# Altium PCB KeyBoardPower.PcbDoc
Units mm, origin at the board's own origin, x right, y up, seen from the top; angles counter-clockwise.
Board outline 83 x 20 mm, 2 copper layers (Top Layer, Bottom Layer), stack 1.4 mm thick; 30 components, 22 nets, 107 pads, 40 vias.
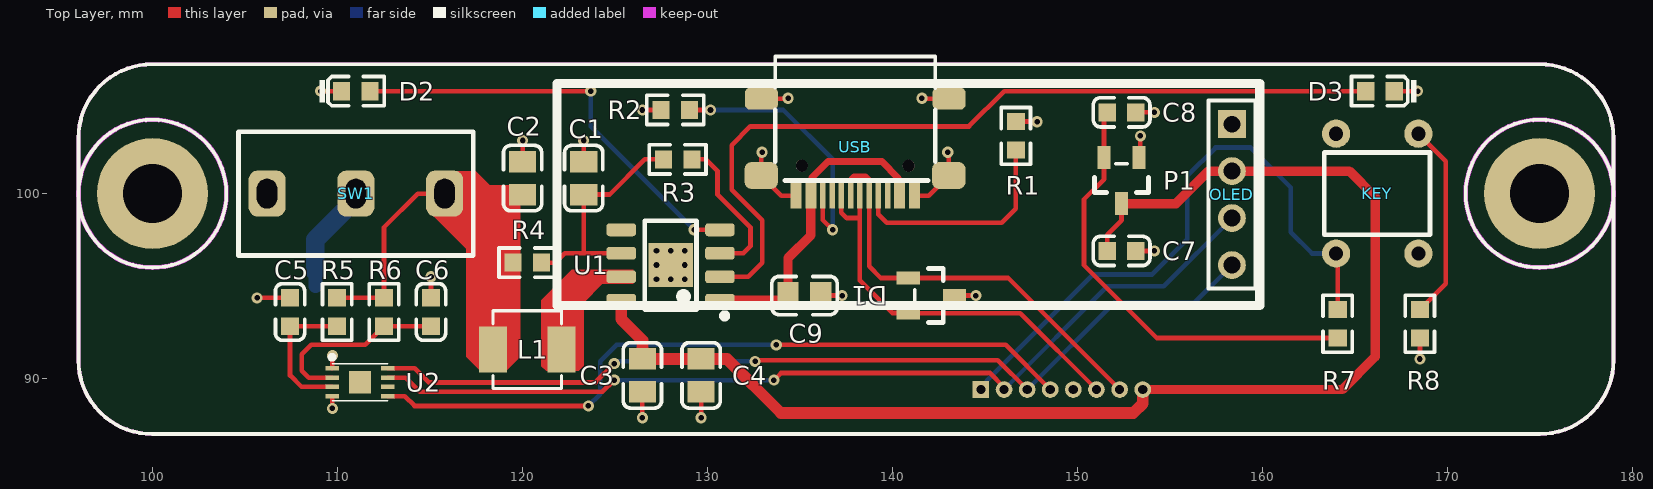
[diagram p0: Top Layer view]
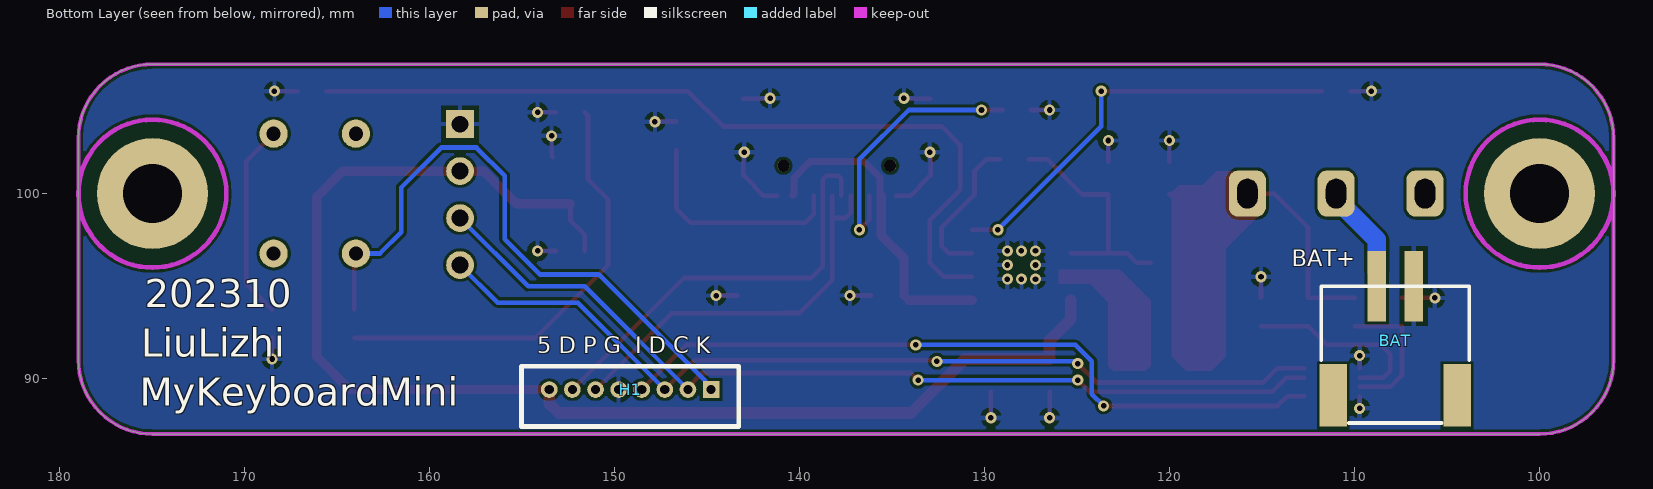
[diagram p1: Bottom Layer view, seen from below]
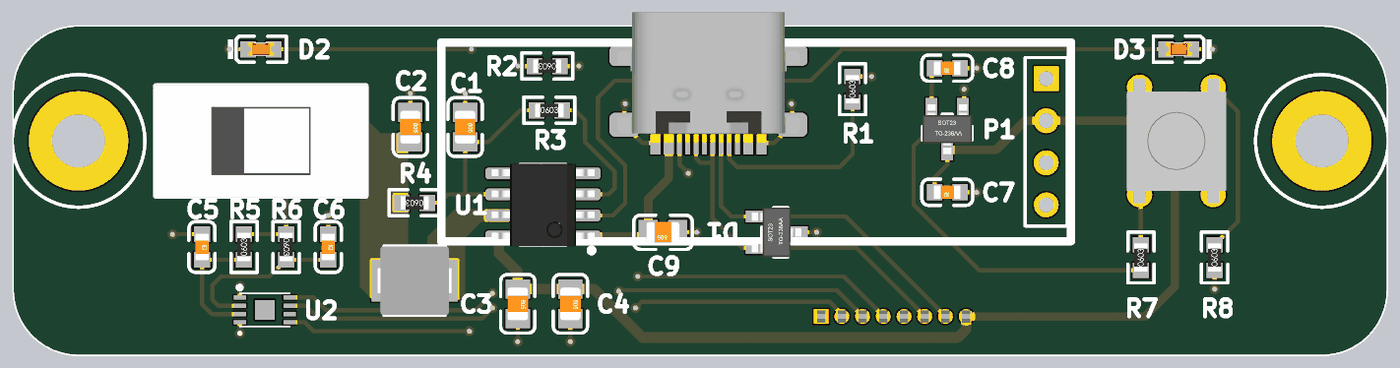
[diagram p2: 3D render of the assembled board from above, using the file's embedded part models]

## Layer stack, top to bottom
Top Solder: solder mask 0.1, Solder Resist, Dk 3.5
Top Layer: signal copper 0.4
Dielectric 1: dielectric 0.6, FR-4, Dk 4.8
Bottom Layer: signal copper 0.4
Bottom Solder: solder mask 0.1, Solder Resist, Dk 3.5

## Board outline
96,91 ccw(c100,91) 100,87 175,87 ccw(c175,91) 179,91 179,103 ccw(c175,103) 175,107 100,107 ccw(c100,103) 96,103

## Design rules (kind name [scope] priority, off if disabled: settings)
Clearance [All] p1: gap=0.152 ignorepadtopadclearanceinfootprint=FALSE
PolygonConnect [All] p1: connectstyle=Relief reliefconductorwidth=0.254 reliefentries=4 polygonreliefangle="90 Angle" airgapwidth=0.254
RoutingVias [All] p1: holewidth=0.711 width=1.27 viastyle="Through Hole" minholewidth=0.3 minwidth=0.45 maxholewidth=0.3 maxwidth=0.6
SolderMaskExpansion [All] p1: expansion=0.102 istentingtop=FALSE
Width [All] p1: maxlimit=2.54 minlimit=0.102 preferedwidth=0.254
30 further rules are at their usual default settings.

## Components (designator, comment, footprint, x,y, rotation, side; value= is the part's Value field where it differs from the comment)
BAT "PH2.0mm" PH2.0_2P_SMT_L 106.807,94.996 r0 bottom
C1 "22uF" 0805 123.317,100.838 r270 top
C2 "22uF" 0805 120.015,100.838 r270 top
C3 "22uF" 0805 126.492,90.17 r270 top
C4 "22uF" 0805 129.667,90.17 r270 top
C5 "1uF" 0603 107.442,93.599 r270 top
C6 "1uF" 0603 115.062,93.599 r270 top
C7 "104" 0603 152.4,96.901 r180 top
C8 "104" 0603 152.4,104.394 r180 top
C9 "22uF" 0805 135.255,94.488 r180 top
D1 "PESD5V2S2UT" SOT23 142.113,94.488 r0 top
D2 "LED" LED_0603 110.998,105.537 r0 top
D3 "LED" LED_0603 166.37,105.537 r180 top
H1 "SH1.25mm_8P" SH1.25MM_8P 153.543,89.408 r180 bottom locked
KEY "KEY" KEY_DIP_6 164,96.762 r90 top
L1 "1uH" L_0420 120.269,91.567 r0 top
OLED "Header_2.54_4P" HDR1_4P 158.369,103.759 r270 top locked
P1 "3V3" SOT23 152.4,100.711 r270 top
R1 "5K1" R_0603 146.685,103.124 r90 top
R2 "5K1" R_0603 128.27,104.521 r180 top
R3 "1K" R_0603 128.397,101.854 r0 top
R4 "0.5R" R_0603 120.269,96.266 r180 top
R5 "100R" R_0603 109.982,93.599 r90 top
R6 "470R" R_0603 112.522,93.599 r270 top
R7 "10K" R_0603 164.084,92.964 r90 top
R8 "100R" R_0603 168.529,92.964 r90 top
SW1 "SWITCH" SWITCH_SS12D10 111,100 r180 top locked
U1 "IP5306" eSOP8 128.016,96.139 r180 top
U2 "CW2015" CW2015_TDFN 109.728,90.551 r0 top
USB "USB_C" USB_C_16P_SMT 138,100.457 r180 top locked

## Footprints (in the part's own frame and the unit in brackets; to place one, negate y for a bottom-side part, rotate by r counter-clockwise, add the part's x,y. Pads: shape width x height; smd on the part's side, far side on the other; paste and mask are expansions set on the pad)
0603 [mm]
  rect 0.93x0.98 smd: 1(-0.77,0) 2(0.77,0)
  silkscreen extent -1.53,-0.79 1.54,0.79, body extent -0.8,-0.4 0.8,0.4, height 0.3
0805 [mm]
  rect 1.16x1.47 smd: 1(-0.89,0) 2(0.89,0)
  silkscreen extent -1.77,-1.04 1.77,1.04, body extent -1,-0.62 1,0.63, height 0.77
CW2015_TDFN [mm]
  rect 0.74x0.25 smd: 1(0,0) 2(0,-0.5) 3(0,-1) 4(0,-1.5) 5(3,-1.5) 6(3,-1) 7(3,-0.5) 8(3,0)
  rect 1.2x1.2 smd: 9(1.5,-0.75)
  silkscreen extent -0.12,-1.75 3,0.71
eSOP8 [mm]
  rrect50% 1.6x0.7 smd: 1(-2.667,1.905) 2(-2.667,0.635) 3(-2.667,-0.635) 4(-2.667,-1.905) 5(2.667,-1.905) 6(2.667,-0.635) 7(2.667,0.635) 8(2.667,1.905)
  rect 2.4x2.4 smd: 9(0,0)
  silkscreen extent -3.08,-2.4 1.4,2.9, body extent -3.1,-2.5 3.1,2.5, height 1.75
HDR1_4P [mm]
  rect 1.5x1.5 hole 0.9: 1(0,0)
  round 1.5 hole 0.9: 2(2.54,0) 3(5.08,0) 4(7.62,0)
  silkscreen extent -1.27,-1.27 8.89,1.27
KEY_DIP_6 [mil]
  round 60 hole 30: 1(0,0) 2(255,0) 3(0,-175) 4(255,-175)
  silkscreen extent 40,-200 215,25, body extent -30,-206 285,31, height 268
L_0420 [mm]
  rect 1.5x2.5 smd: 1(-1.85,0) 2(1.85,0)
  silkscreen extent -1.85,-2.1 1.85,2.1, body extent -2.24,-2.06 2.24,2.06, height 2.12
LED_0603 [mm]
  rect 0.93x0.98 smd: A(0.77,0) K(-0.77,0)
  silkscreen extent -1.97,-0.79 1.54,0.79, body extent -0.8,-0.4 0.8,0.4, height 0.6
PH2.0_2P_SMT_L [mm]
  rect 1.5x3.4 smd: 0(-2.35,5.9) 0(4.35,5.9)
  rect 1x3.8 smd: 1(0,0) 2(2,0)
  silkscreen extent -3,0 5,7.4, body extent -3.08,-0.93 5.07,7.33, height 5.38
R_0603 [mm]
  rect 0.93x0.98 smd: 1(-0.77,0) 2(0.77,0)
  silkscreen extent -1.53,-0.79 1.54,0.79, body extent -0.85,-0.4 0.85,0.4, height 0.56
SH1.25MM_8P [mm]
  rect 0.9x0.9 hole 0.5: 1(8.75,0)
  round 0.9 hole 0.5: 2(7.5,0) 3(6.25,0) 4(5,0) 5(3.75,0) 6(2.5,0) 7(1.25,0) 8(0,0)
  silkscreen extent -1.5,-2 10.25,1.25, body extent -1.5,-1.95 10.25,1.25, height 4.7
SOT23 [mm]
  rect 1.25x0.7 smd: 1(-1.25,0.95) 2(-1.25,-0.95) 3(1.25,0)
  silkscreen extent -0.9,-1.46 0.65,1.46, body extent -1.5,-1.5 1.5,1.5, height 1.3
SWITCH_SS12D10 [mm]
  rrect50% 2x2.5 hole 1.1 slot 1.6 at 90 deg: 1(-4.8,0) 2(0,0) 3(4.8,0)
  silkscreen extent -6.35,-3.35 6.35,3.35, body extent -6.5,-3.4 6.5,3.4, height 10.2
USB_C_16P_SMT [mm]
  rrect50% 1.8x1.2 smd: 0(-5.07,-4.677) 0(5.07,-4.677)
  rrect50% 1.8x1.45 smd: 0(-5.06,-0.519) 0(5.08,-0.519)
  rect 0.6x1.4 smd: 1(-3.2,0.57) 2(-2.4,0.57) 11(2.4,0.57) 12(3.2,0.57)
  rect 0.3x1.4 smd: 3(-1.75,0.57) 4(-1.25,0.57) 5(-0.75,0.57) 6(-0.25,0.57) 7(0.25,0.57) 8(0.75,0.57) 9(1.25,0.57) 10(1.75,0.57)
  round 0.65 hole 0.65: 13(-2.888,-1.049) 13(2.888,-1.049)
  silkscreen extent -4.32,-6.96 4.32,-0.25, body extent -5.5,-7.3 5.5,0.55, height 3.2

## Part data
BAT: library part PH2.0mm_2P_SMT_L, "PH2.0"
C1 C2 C3 C4 C9: library part CAP_0805, "贴片电容 0805"
C5 C6 C7 C8: library part CAP_0603, "贴片电容 0603"
D1: "ESD DIODE"
D2 D3: library part LED_0603, "LED 0603"
H1: "SH"
KEY: library part KEY_DIP_6, "直插立式按键 6mm"
L1: library part L_0420, "电感 0420"
OLED: "PinHeader 2.54"
P1: library part LDO_XC6206P332MR, "线性稳压器"
R1 R2 R3 R4 R5 R6 R7 R8: library part RES_0603, "电阻 0603"
SW1: library part SWITCH_SS12D10, "直插3A滑动开关"
U1: "电池充电"
U2: library part CW2015_TDFN, "锂电池电量计"
USB: library part USB_C_16P_SMT, "全贴片USB C母座"

## Free pads (board coordinates)
  round 6 hole 3.2: 0(100,100) 0(175,100)

## Via types
v1: diameter 0.6, hole 0.3, Top Layer to Bottom Layer, tented both sides, 40 vias

## Nets (pads, with @x,y where several pads share a name; then routed paths per layer and width w, separated by ;. In a path a pad name is that pad's centre, name@x,y a point inside that pad or via, vN(x,y) a via of type N, cw(c..) or ccw(c..) an arc to the next point about the centre after c; other vN are vias at no path point)
3V3: C8.2 P1.2 R7.1 | length 24.1
  Top Layer w0.254: C8.2 151.45,104.214 P1.2 151.45,100.777 150.368,99.695 150.368,96.139 154.313,92.194 R7.1
5V: C3.1 C4.1 C7.2 H1.8 OLED.2 P1.3 U1.8 | length 72.7
  Top Layer w0.254: C7.2 151.63,97.782 152.4,98.552 P1.3
  Top Layer w0.508: P1.3 155.341,99.461 157.099,101.219 OLED.2 164.719,101.219 166.116,99.822 166.116,91.186 164.338,89.408 H1.8
  Top Layer w0.635: U1.8 125.349,93.218 126.492,92.075 C3.1 C4.1 131.063,91.06 133.985,88.138 153.035,88.138 153.543,88.646 H1.8
GND: BAT.1 C1.1 C2.1 C3.2 C4.2 C5.1 C6.1 C7.1 C8.1 C9.1 D1.3 D2.K D3.K H1.5 OLED.1 P1.1 R1.2 R2.2 R8.1 U1.9 U2.1 U2.4 USB.0 USB.1 USB.12 | length 30.7
  Top Layer w0.254: v1(105.664,94.361) 105.672,94.369 C5.1 ; v1(109.093,105.537) D2.K ; v1(109.728,88.392) U2.4 ; U2.1 v1(109.728,91.242) ; C6.1 v1(115.062,95.504) ; C2.1 v1(120.015,102.87) ; C1.1 v1(123.317,102.87) ; v1(126.492,87.884) C3.2 ; v1(126.492,104.521) R2.2 ; v1(129.667,87.884) C4.2 ; USB.0@132.93,105.134 134.344,105.134 v1(134.366,105.156) ; v1(132.969,102.235) 132.92,102.186 132.92,100.976 132.968,100.976 133.548,100.396 133.548,100.348 134.009,99.887 USB.12 ; C9.1 v1(137.287,94.488) ; USB.1 141.971,99.887 142.432,100.348 142.432,100.396 143.012,100.976 USB.0@143.06,100.976 ; v1(141.605,105.156) 141.627,105.134 USB.0@143.07,105.134 ; v1(143.002,102.235) 143.059,102.178 USB.0@143.059,100.977 ; D1.3 v1(144.526,94.488) ; R1.2 147.82,103.894 v1(147.828,103.886) ; C7.1 v1(154.178,96.901) ; C8.1 v1(154.178,104.394) ; P1.1 153.416,102.027 v1(153.416,103.124) ; D3.K v1(168.402,105.537) ; v1(168.529,91.059) R8.1
  other v1: 127.254,95.377 128.016,95.377 128.778,95.377 127.254,96.139 128.778,96.139 127.254,96.901 128.016,96.901 128.778,96.901
INT: H1.4 U2.5 | length 39.4
  Top Layer w0.254: U2.5 113.641,89.051 114.173,88.519 v1(123.571,88.519) ; v1(133.731,91.821) 146.13,91.821 H1.4
  Bottom Layer w0.254: v1(123.571,88.519) 124.206,89.154 124.206,90.932 125.095,91.821 v1(133.731,91.821)
IO48: H1.1 KEY.1 R7.2 | length 33.6
  Top Layer w0.254: KEY.1 164.084,96.678 R7.2
  Bottom Layer w0.254: H1.1 145.116,89.731 145.116,89.871 150.876,95.631 154.051,95.631 155.956,97.536 155.956,100.965 157.48,102.489 159.385,102.489 161.544,100.33 161.544,97.917 162.699,96.762 KEY.1
NetBAT_2: BAT.2 SW1.2 | length 6.4
  Bottom Layer w0.254: BAT.2@108.807,95.774 BAT.2@109.18,96.147
  Bottom Layer w0.762: BAT.2 BAT.2@108.807,95.774 ; SW1.2@111,99.697 SW1.2
  Bottom Layer w1.016: BAT.2@108.807,95.774 108.807,97.504 SW1.2@111,99.697
NetC1_2: C1.2 R3.1 R4.1 U1.6 | length 12.8
  Top Layer w0.254: R4.1 121.793,96.266 122.301,96.774 123.317,96.774 ; U1.6 123.317,96.774 ; R3.1 126.619,101.854 124.713,99.948 C1.2 123.317,96.774
NetC2_2: C2.2 L1.1 R4.2 R5.2 R6.1 SW1.1 | length 23.7
  Top Layer w0.254: R5.2 R6.1 112.522,98.171 114.351,100 SW1.1 119.963,100 C2.2 119.952,99.948 119.499,99.495 R4.2 119.499,94.607 118.419,93.527 L1.1
NetC5_2: C5.2 R5.1 U2.3 | length 7.7
  Top Layer w0.254: U2.3 108.061,89.551 107.442,90.17 C5.2 R5.1
NetC6_2: C6.2 R6.2 U2.2 | length 10.3
  Top Layer w0.254: U2.2 108.45,90.051 108.077,90.424 108.077,91.313 108.585,91.821 111.514,91.821 112.159,92.466 112.159,92.491 112.497,92.829 R6.2 C6.2
NetD2_A: D2.A U1.4 | length 23.1
  Top Layer w0.254: D2.A v1(123.698,105.537) ; v1(129.286,98.044) U1.4
  Bottom Layer w0.254: v1(123.698,105.537) 123.698,103.632 v1(129.286,98.044)
NetD3_A: D3.A U1.2 | length 45.1
  Top Layer w0.254: U1.2 132.207,95.504 132.969,96.266 132.969,98.552 131.318,100.203 131.318,102.616 132.334,103.632 144.145,103.632 146.05,105.537 D3.A
NetKEY_4: KEY.4 R8.2 | length 10.7
  Top Layer w0.254: KEY.4 169.926,101.758 169.926,95.131 168.892,94.097 168.892,94.072 168.554,93.734 R8.2
NetL1_2: L1.2 U1.7 | length 5.9
  Top Layer w0.508: L1.2 122.119,93.417 124.206,95.504 U1.7
NetR1_1: R1.1 USB.4 | length 12.1
  Top Layer w0.254: USB.4 139.25,98.875 139.7,98.425 145.923,98.425 146.685,99.187 R1.1
NetR2_1: R2.1 USB.10 | length 14.7
  Top Layer w0.254: R2.1 v1(130.175,104.521) ; USB.10 136.25,98.573 v1(136.779,98.044)
  Bottom Layer w0.254: v1(130.175,104.521) 134.112,104.521 136.779,101.854 v1(136.779,98.044)
NetR3_2: R3.2 U1.3 | length 8.3
  Top Layer w0.254: R3.2 129.921,101.854 130.556,101.219 130.556,99.949 132.334,98.171 132.334,97.155 131.953,96.774 U1.3
SCL: H1.2 OLED.3 U2.7 | length 50.7
  Top Layer w0.254: U2.7 113.69,90.051 114.46,89.281 124.333,89.281 v1(124.968,89.916) ; v1(133.604,89.916) 133.985,90.297 145.288,90.297 146.043,89.542 H1.2
  Bottom Layer w0.254: v1(124.968,89.916) v1(133.604,89.916) ; H1.2 151.631,94.996 154.686,94.996 OLED.3
SDA: H1.3 OLED.4 U2.8 | length 49.9
  Top Layer w0.254: U2.8 114.173,90.551 114.935,89.789 123.952,89.789 v1(124.968,90.805) ; v1(132.588,90.932) 132.647,90.991 145.71,90.991 H1.3
  Bottom Layer w0.254: v1(124.968,90.805) 125.062,90.805 125.2,90.943 132.577,90.943 v1(132.588,90.932) ; H1.3 151.992,94.107 156.337,94.107 OLED.4
USB_DM: D1.1 H1.7 USB.5 USB.7 | length 23.1
  Top Layer w0.254: USB.7 137.75,100.793 137.922,100.965 138.557,100.965 138.75,100.772 USB.5 138.75,96.073 139.385,95.438 D1.1 146.263,95.438 H1.7
USB_DP: D1.2 H1.6 USB.6 USB.8 | length 21.9
  Top Layer w0.254: USB.8 137.25,98.97 137.541,98.679 138.25,98.679 ; USB.6 138.25,98.679 ; H1.6 146.913,93.538 D1.2 140.854,93.547 140.006,93.547 138.25,95.303 138.25,98.679
VBUS: C9.2 U1.1 USB.2 USB.11 | length 17.1
  Top Layer w0.381: C9.2@134.111,94.234 C9.2 C9.2 ; USB.11 135.666,99.953 135.666,100.868 136.525,101.727 139.446,101.727 140.32,100.853 140.32,99.967 USB.2
  Top Layer w0.508: U1.1 C9.2@134.111,94.234 ; C9.2 134.366,96.52 135.6,97.754 USB.11
pads on no net: BAT.0 KEY.2 KEY.3 SW1.3 U1.5 U2.6 U2.9 USB.3 USB.9 USB.13

## Polygon pours and split planes (outlines as drawn)
GND on Bottom Layer "GND_L02_P000" (solid, remove dead copper, pour order 0): 96,91 ccw(c100,91) 100,87 175,87 ccw(c175,91) 179,91 179,103 ccw(c175,103) 175,107 100,107 ccw(c100,103) 96,103

## Keep-outs
Top Layer:
  circle w0.254: c175,100 r4
  circle w0.254: c100,100 r4
  lines w0.2: 96,91 ccw(c100,91) 100,87 175,87 ccw(c175,91) 179,91 179,103 ccw(c175,103) 175,107 100,107 ccw(c100,103) 96,103 96,91
Bottom Layer:
  circle w0.254: c100,100 r4
  circle w0.254: c175,100 r4
  lines w0.2: 96,91 ccw(c100,91) 100,87 175,87 ccw(c175,91) 179,91 179,103 ccw(c175,103) 175,107 100,107 ccw(c100,103) 96,103 96,91

## Other copper
Top Layer:
  region net NetL1_2: 123.063,90.424 123.317,90.678 123.317,94.107 124.333,95.123 125.984,95.123 125.984,95.885 122.682,95.885 121.031,94.234 121.031,90.678 121.285,90.424
  region net NetC2_2: 119.126,90.424 119.888,91.186 119.888,100.076 119.507,100.457 118.237,100.457 117.475,101.219 115.316,101.219 114.808,100.711 114.808,99.187 116.967,97.028 116.967,91.186 117.729,90.424

## Silkscreen, mask and mechanical layers (free items; w line width, h text height)
Top Overlay:
  circle w0.2: c175,100 r4
  circle w0.2: c100,100 r4
  lines w0.2: 96,91 ccw(c100,91) 100,87 175,87 ccw(c175,91) 179,91 179,103 ccw(c175,103) 175,107 100,107 ccw(c100,103) 96,103 96,91
  lines w0.5: 121.869,93.949 159.869,93.949 159.869,105.949 121.869,105.949 121.869,93.949
Bottom Overlay:
  text "BAT+" at 113.395,95.778 h1.52
  text "202310" at 175.404,93.853 h1.52
  text "LiuLizhi" at 175.597,91.186 h1.52
  text "5 D P G  I D C K" at 154.19,91.079 h1.52
  text "MyKeyboardMini" at 175.693,88.519 h1.52